# EAGLE board RasPi_Controller_RHD_Rev3_GND_Stitch (EAGLE 9.6.2)
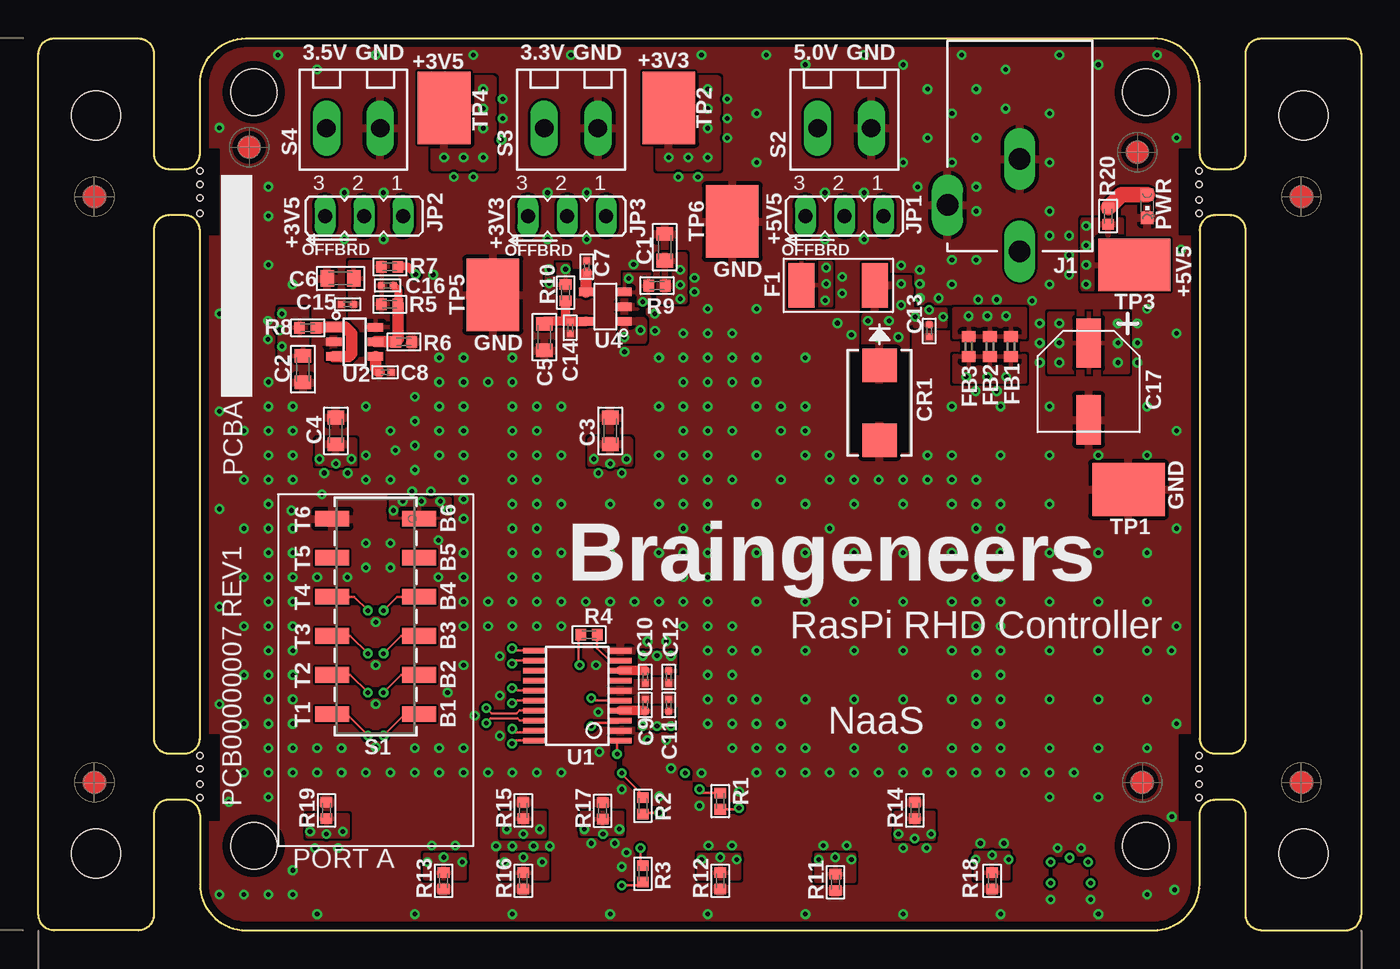
[diagram p0: board, top side]
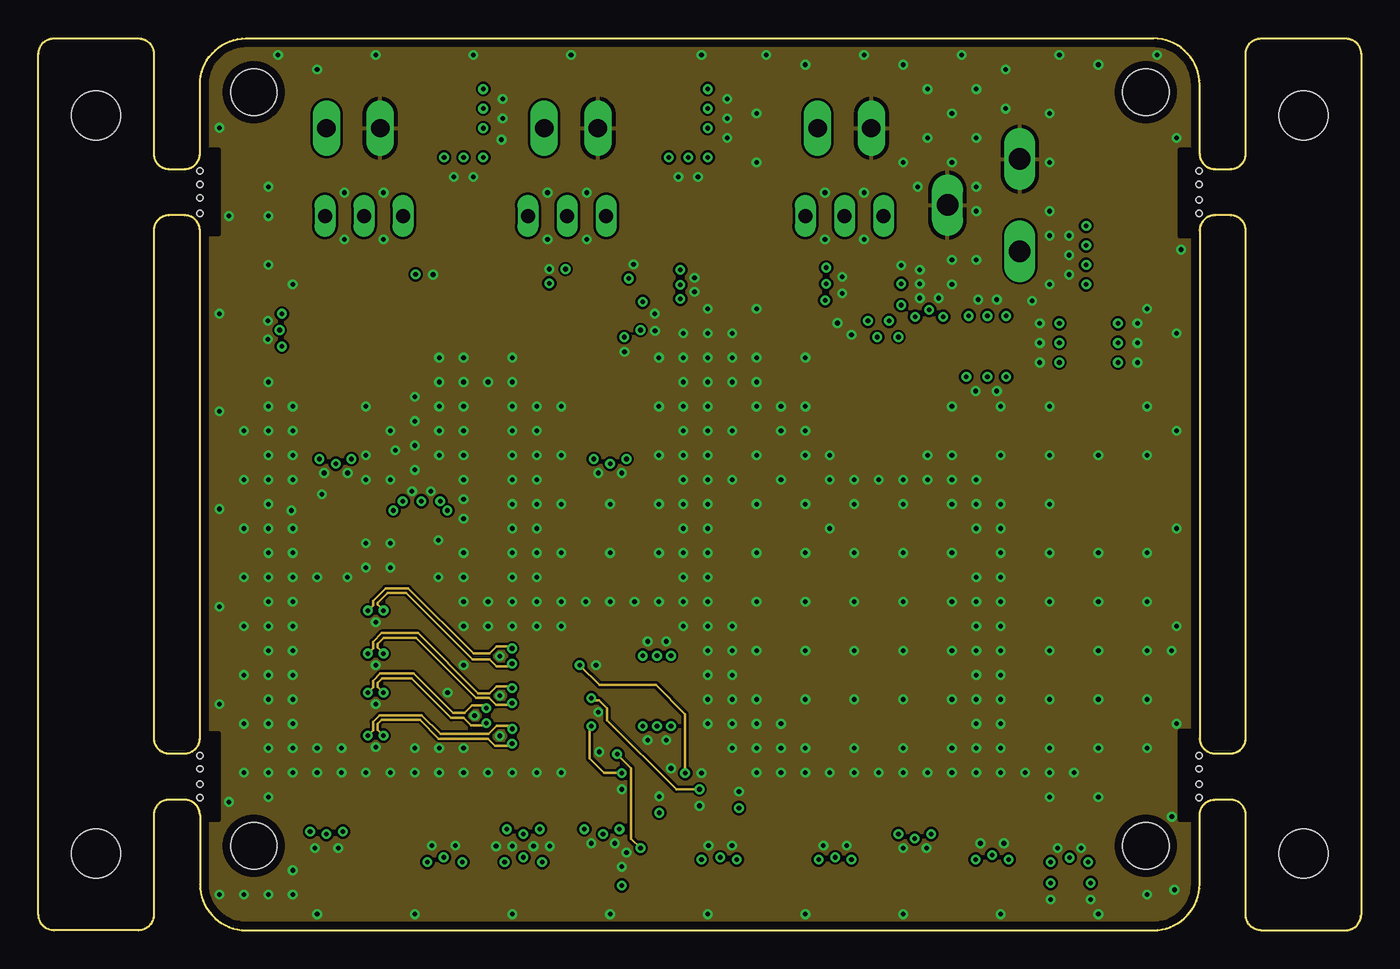
[diagram p1: board, inner layer Signal/Power2]
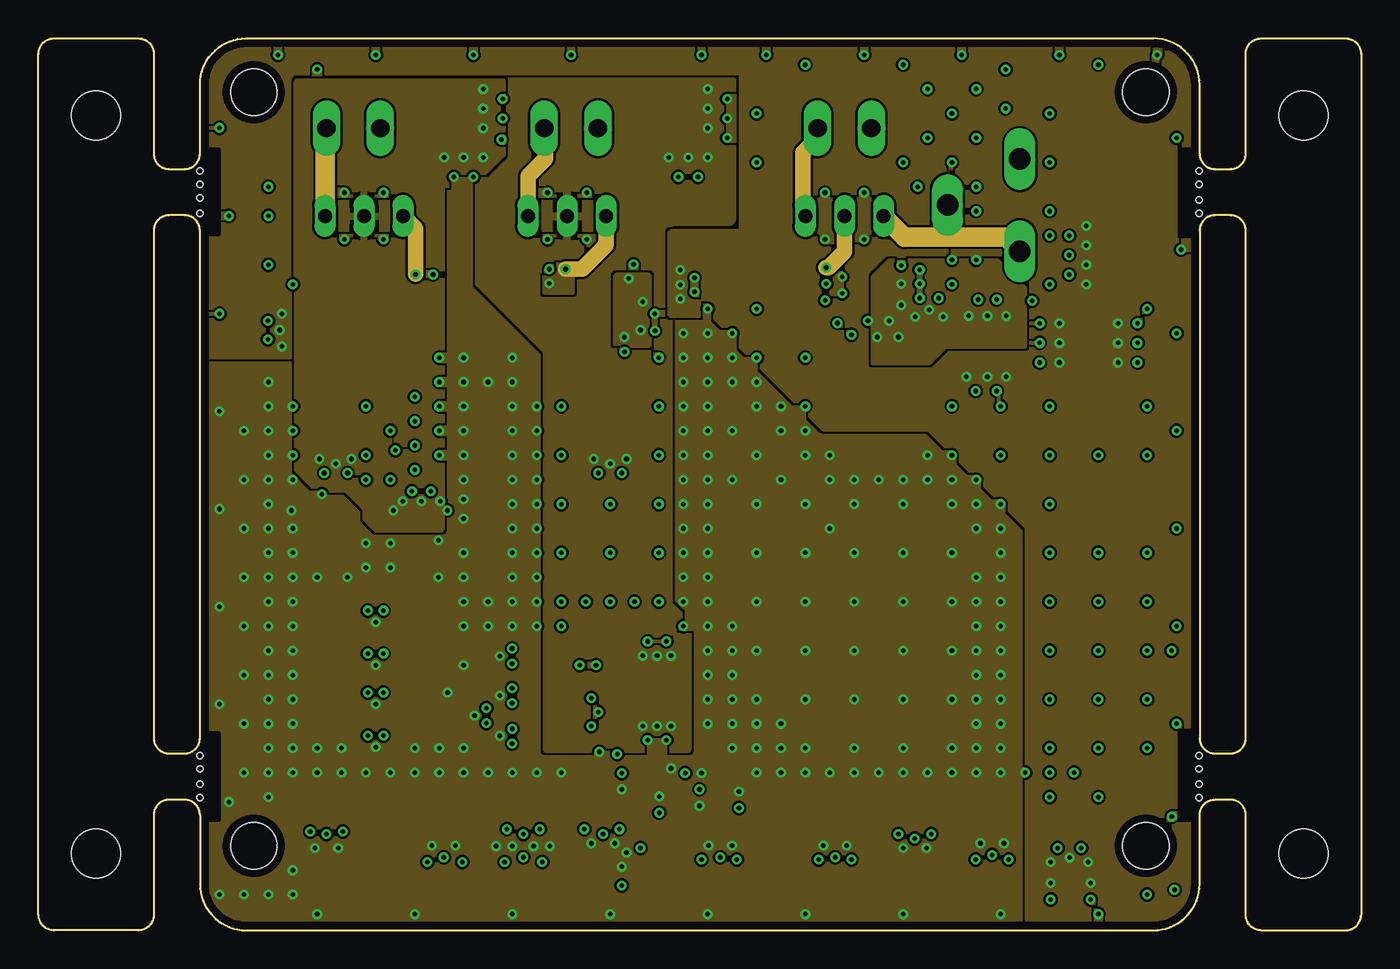
[diagram p2: board, inner layer Signal/Power3]
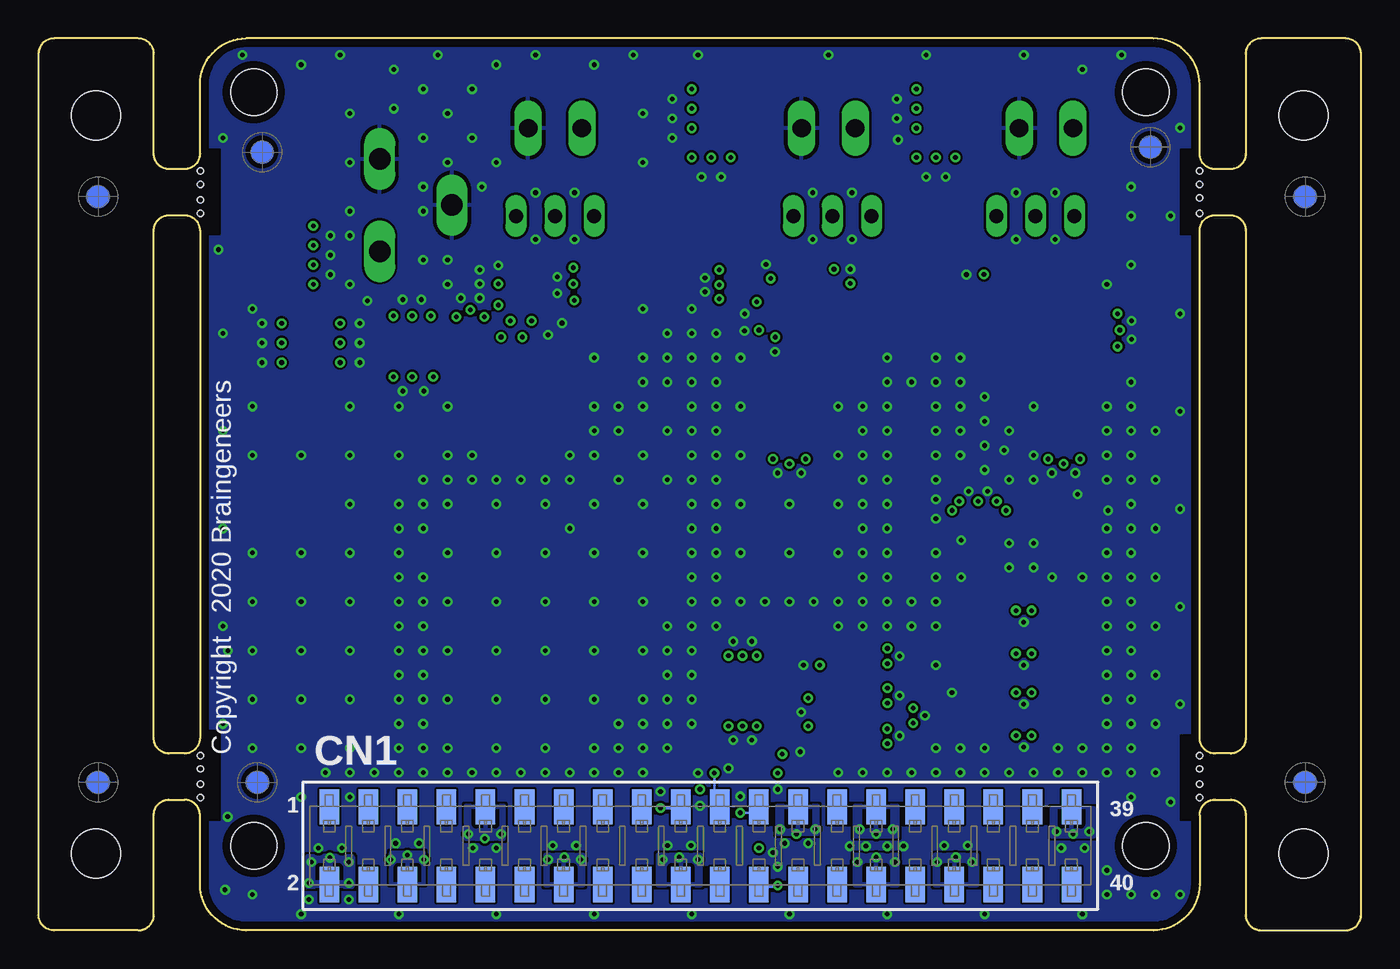
[diagram p3: board, bottom side, seen from below]

Size 86 x 58 mm. Coordinates in mm from the lower left corner, seen from the top.
Outline: 10.5,7.5 10.5,3 arc90 13.5,0 72.5,0 arc90 75.5,3 75.5,7.5 arc-90 76.5,8.5 77.5,8.5 arc-90 78.5,7.5 78.5,1 arc90 79.5,0 85,0 arc90 86,1 86,57 arc90 85,58 79.5,58 arc90 78.5,57 78.5,50.5 arc-90 77.5,49.5 76.5,49.5 arc-90 75.5,50.5 75.5,55 arc90 72.5,58 13.5,58 arc90 10.5,55 10.5,50.5 arc-90 9.5,49.5 8.5,49.5 arc-90 7.5,50.5 7.5,57 arc90 6.5,58 1,58 arc90 0,57 0,1 arc90 1,0 6.5,0 arc90 7.5,1 7.5,7.5 arc-90 8.5,8.5 9.5,8.5 arc-90 10.5,7.5
Outline: 10.5,12.5 10.5,45.5 arc90 9.5,46.5 8.5,46.5 arc90 7.5,45.5 7.5,12.5 arc90 8.5,11.5 9.5,11.5 arc90 10.5,12.5
Outline: 75.5,45.5 75.5,12.5 arc90 76.5,11.5 77.5,11.5 arc90 78.5,12.5 78.5,45.5 arc90 77.5,46.5 76.5,46.5 arc90 75.5,45.5
Copper layers (1+2*15+16): Top(GND)1 0.035mm / dielectric 8mil / Signal/Power2 0.035mm / dielectric 1.0284mm / Signal/Power3 0.035mm / dielectric 8mil / Bottom(GND)4 0.035mm
Design rules "default *": minimum track width 6mil, minimum drill 10mil, track to track 6mil, track to pad 6.5mil, pad to pad 6mil, via to via 6mil, smd to smd 6mil, copper to edge 20mil, drill to drill 15mil, minimum pad ring 6.5mil, minimum via ring 6.5mil, stop-mask expansion 3mil, vias tented up to drill 12mil, thermal gap 10mil
Net classes: 0 default: width 0.152 mm; 1 thick: width 0.254 mm; 2 power: width 0.61 mm; 3 diff pairs: width 0.152 mm
Holes 3 mm at 14,5.5 72,5.5 14,54.5 72,54.5
Holes 0.38 mm at 10.5,8.63 10.5,9.5 10.5,10.5 10.5,11.37 10.5,46.63 10.5,49.37 10.5,48.5 10.5,47.63 75.47,8.63 75.47,9.5 75.47,10.5 75.47,11.37 75.47,46.63 75.47,49.37 75.47,48.5 75.47,47.5
Holes 3.17 mm at 3.75,5 3.75,53 82.25,5 82.25,53
tKeepout: area 10.5,45.3 to 11.8,50.8; area 10.5,7.2 to 11.8,12.8; area 74.2,7.2 to 75.5,13; area 74.2,45.1 to 75.5,50.8
bKeepout: area 10.5,45.3 to 11.8,50.8; area 10.5,7.2 to 11.8,12.8; area 74.2,7.2 to 75.5,12.8; area 74.2,45.1 to 75.5,50.8
tRestrict: area 10.5,7.2 to 11.7,12.7; area 74.2,7.2 to 75.4,12.7; area 74.2,45.3 to 75.4,50.8; area 10.5,45.3 to 11.7,50.8
bRestrict: area 10.5,7.2 to 11.7,12.7; area 10.5,45.3 to 11.7,50.8; area 74.2,45.3 to 75.4,50.8; area 74.2,7.2 to 75.4,13

## Footprints (pad centres in the part's own frame; a part is rotated, then mirrored left to right if it is on the bottom)
0603 = smd 0.889 x 1.067: 1 -0.864,0; 2 0.864,0
0201 = smd 0.432 x 0.432: 1 -0.394,0; 2 0.394,0
EEE-HAE101XAP = smd 1.6 x 3.2: 1 0,0; 2 0,5
SAMTEC-HLE-120-02-X-DV = smd 1.27 x 2.29 bottom: 1 24.13,2.527; 2 24.13,-2.527; 3 21.59,2.527; 4 21.59,-2.527; 5 19.05,2.527; 6 19.05,-2.527; 7 16.51,2.527; 8 16.51,-2.527; 9 13.97,2.527; 10 13.97,-2.527; 11 11.43,2.527; 12 11.43,-2.527; 13 8.89,2.527; 14 8.89,-2.527; 15 6.35,2.527; 16 6.35,-2.527; 17 3.81,2.527; 18 3.81,-2.527; 19 1.27,2.527; 20 1.27,-2.527; 21 -1.27,2.527; 22 -1.27,-2.527; 23 -3.81,2.527; 24 -3.81,-2.527; 25 -6.35,2.527; 26 -6.35,-2.527; 27 -8.89,2.527; 28 -8.89,-2.527; 29 -11.43,2.527; 30 -11.43,-2.527; 31 -13.97,2.527; 32 -13.97,-2.527; 33 -16.51,2.527; 34 -16.51,-2.527; 35 -19.05,2.527; 36 -19.05,-2.527; 37 -21.59,2.527; 38 -21.59,-2.527; 39 -24.13,2.527; 40 -24.13,-2.527
DIODE_DO214AA = smd 2.159 x 2.261: 1 -2.438,0; 2 2.438,0
MF-MSMF250/16X-2 = smd 1.676 x 2.896: P$1 0.838,1.448; P$2 5.613,1.448
0402 = smd 0.7 x 0.9: 1 -0.65,0; 2 0.65,0
PJ-102AH = drill 1.4 long: 1 0,-3; 2 0,3; 3 -4.7,0
JP2 = drill 0.914 long: 1 -2.54,0; 2 0,0; 3 2.54,0
CHIPLED_0603 = smd 0.8 x 0.8: A 0,-0.75; C 0,0.75
0402' = smd 0.686 x 0.762: 1 -0.533,0; 2 0.533,0
INTAN_SMT_RHD_SPI_CABLE_ADAPTER = smd 1.016 x 2.223: B1 6.35,2.826; B2 3.81,2.826; B3 1.27,2.826; B4 -1.27,2.826; B5 -3.81,2.826; B6 -6.35,2.826; T1 6.35,-2.826; T2 3.81,-2.826; T3 1.27,-2.826; T4 -1.27,-2.826; T5 -3.81,-2.826; T6 -6.35,-2.826
TERMINAL_BLOCK_3.5MM_2_5V = drill 1.2 long: 1 -1.75,0; 2 1.75,0
TERMINAL_BLOCK_3.5MM_2_3.3V = drill 1.2 long: 1 -1.75,0; 2 1.75,0
TERMINAL_BLOCK_3.5MM_2_3.5V = drill 1.2 long: 1 -1.75,0; 2 1.75,0
5016 = smd 4.699 x 3.429: P$1 -0.051,0
TSSOP-20 = smd 0.348 x 1.397: 1 -2.923,-2.814; 2 -2.273,-2.815; 3 -1.623,-2.815; 4 -0.973,-2.815; 5 -0.323,-2.815; 6 0.327,-2.815; 7 0.977,-2.815; 8 1.627,-2.815; 9 2.277,-2.815; 10 2.927,-2.815; 11 2.927,2.825; 12 2.277,2.825; 13 1.627,2.825; 14 0.977,2.825; 15 0.327,2.825; 16 -0.323,2.825; 17 -0.973,2.825; 18 -1.623,2.825; 19 -2.273,2.825; 20 -2.923,2.825
SOT-23-6 = smd 0.55 x 1: 1 -0.95,-1.35; 2 0,-1.35; 3 0.95,-1.35; 4 0.95,1.35; 5 0,1.35; 6 -0.95,1.35
TSOT-23-5 = smd 0.55 x 0.9: 1 -0.95,-1.25; 2 0,-1.25; 3 0.95,-1.25; 4 0.95,1.25; 5 -0.95,1.25

## Placement (x,y rotation side)
C1  1.0u  [0603]  40.73,44.42 90 top
C2  1.0u  [0603]  17.21,36.49 270 top
C3  22u  [0603]  37.17,32.48 90 top
C4  22u  [0603]  19.34,32.48 90 top
C5  22u  [0603]  32.9,38.58 270 top
C6  22u  [0603]  19.64,42.39 180 top
C7  10n  [0201]  35.65,43.15 90 top
C8  10n  [0201]  22.54,36.29 0 top
C9  10n  [0201]  39.46,14.65 90 top
C10  10n  [0201]  39.46,16.48 270 top
C11  100n  [0201]  40.98,14.65 90 top
C12  100n  [0201]  40.98,16.48 270 top
C13  100n  [0201]  57.92,38.98 270 top
C14  100n  [0201]  34.58,39.19 270 top
C15  100n  [0201]  20.1,40.71 180 top
C16  15p  [0201]  22.69,41.93 0 top
C17  100u  [EEE-HAE101XAP]  68.28,38.2 180 top
CN1  ADA3708SMT_PI_HEADER_FEMALE  [SAMTEC-HLE-120-02-X-DV]  42.96,5.51 0 top
CR1  SMBJ5.0A  [DIODE_DO214AA]  54.7,34.31 270 top
DRILEGEND  [DRILEGEND]  34.74,-14.92 0 top  (outside the outline)
F1  MF-MSMF250/X  [MF-MSMF250/16X-2]  48.78,40.51 0 top
FB1  BLM15HB121SN1  [0402]  63.23,37.97 270 top
FB2  BLM15HB121SN1  [0402]  61.86,37.97 270 top
FB3  BLM15HB121SN1  [0402]  60.49,37.97 270 top
J1  DC_POWER_JACK-PJ-102AH  [PJ-102AH]  63.81,47.16 0 top
JP1  [JP2]  52.41,46.45 180 top
JP2  [JP2]  21.17,46.45 180 top
JP3  [JP2]  34.38,46.45 180 top
PWR  [CHIPLED_0603]  72.09,47.09 180 top
R1  22.1  [0402']  44.33,8.4 90 top
R2  22.1  [0402']  39.3,8.1 90 top
R3  22.1  [0402']  39.3,3.68 90 top
R4  22.1  [0402']  35.8,19.22 180 top
R5  56.0K  [0402']  22.84,40.71 0 top
R6  30.1K  [0402']  23.76,38.27 0 top
R7  0  [0402']  22.84,43.15 180 top
R8  0  [0402']  17.51,39.19 180 top
R9  0  [0402']  40.22,41.93 0 top
R10  0  [0402']  34.27,41.47 270 top
R11  0  [0402']  51.83,3.12 90 top
R12  0  [0402']  44.33,3.22 90 top
R13  0  [0402']  26.35,3.22 90 top
R14  0  [0402']  56.98,7.79 90 top
R15  0  [0402']  31.53,7.79 90 top
R16  0  [0402']  31.53,3.22 90 top
R17  0  [0402']  36.69,7.77 90 top
R18  0  [0402']  62.01,3.22 90 top
R19  0  [0402']  18.73,7.79 90 top
R20  1K  [0402']  69.56,46.45 90 top
S1  RHD2000-CABLE-DAQ-SIDEINTAN_SMT_SPI_CABLE_ADAPTER  [INTAN_SMT_RHD_SPI_CABLE_ADAPTER]  21.93,20.41 270 top
S2  TERMINAL_BLOCK_2-3.5MM-5V  [TERMINAL_BLOCK_3.5MM_2_5V]  52.41,52.16 180 top
S3  TERMINAL_BLOCK_2-3.5MM-3.3V  [TERMINAL_BLOCK_3.5MM_2_3.3V]  34.63,52.16 180 top
S4  TERMINAL_BLOCK_2-3.5MM-3.5V  [TERMINAL_BLOCK_3.5MM_2_3.5V]  20.48,52.16 180 top
TP1  5016  [5016]  70.83,28.67 180 top
TP2  5016  [5016]  40.98,53.44 270 top
TP3  5016  [5016]  71.31,43.27 0 top
TP4  5016  [5016]  26.38,53.44 270 top
TP5  5016  [5016]  29.55,41.37 90 top
TP6  5016  [5016]  45.12,46.15 90 top
U1  SN65LVDT41  [TSSOP-20]  35.04,15.26 90 top
U2  TPS79301  [SOT-23-6]  20.56,38.27 270 top
U4  TPS79333  [TSOT-23-5]  36.87,40.56 90 top
U$1  [FIDUCIAL_G15]  3.64,9.62 90 top
U$7  [NASS_LOGO_LG]  50.12,7.79 0 top
U$31  [ROHS_LG]  13.83,19.48 0 top
U$32  [FIDUCIAL_G15]  13.7,50.92 270 bottom
U$33  [LOGO_BRAINGENEERS_H_12MM]  39.68,26.31 0 top
U$34  [FIDUCIAL_G15]  3.64,47.72 90 top
U$35  [FIDUCIAL_G15]  3.64,9.62 270 bottom
U$36  [FIDUCIAL_G15]  3.64,47.72 270 bottom
U$48  [FIDUCIAL_G15]  82.13,9.62 90 top
U$49  [FIDUCIAL_G15]  82.13,47.72 90 top
U$50  [FIDUCIAL_G15]  82.13,9.62 270 bottom
U$51  [FIDUCIAL_G15]  82.13,47.72 270 bottom
U$52  [A5L-LOC]  -10.85,-64.19 0 top  (outside the outline)
U$67  [FIDUCIAL_G15]  71.46,50.62 0 top
U$68  [FIDUCIAL_G15]  71.76,9.62 0 top
U$69  [FIDUCIAL_G15]  13.7,50.92 0 top
U$70  [NO_TRASH_LG]  12.02,30.5 0 top
U$72  [STATIC_LG]  12.79,25.01 0 top
U$73  [FIDUCIAL_G15]  71.76,9.62 0 bottom
U$75  [FIDUCIAL_G15]  71.46,50.62 0 bottom
U$84  [COMPYRIGHT_MED]  73.06,22.14 270 top

## Library data of the parts
C1-C6 CN1 F1 J1 S1-S4 U1 U$31 U$33 = Braingeneers_Lib
C7-C16 R1-R20 U2 = RHD2000_eval_board
C17 = Braingeneers_Lib; CAPACITOR: 100u
CR1 = Braingeneers_Lib; BUILT_BY: EMA_UL_Team; MANUFACTURER_PART_NUMBER: SMBJ5.0A; SOURCELIBRARY: Bourns_2014-12-31; VENDOR: Bourns Electronics
DRILEGEND = drilegend
FB1-FB3 = inductors
JP1-JP3 = jumper
PWR = adafruit
TP1-TP6 = RHD2000
U4 = harrison
U$1 U$32 U$34-U$36 U$48-U$51 U$67-U$69 U$73 U$75 = dicons
U$7 U$70 U$72 U$84 = logo_braingeneers
U$52 = frames

## Nets
!CS!: R3.2 U1.1
!CS!_N [diff pairs]: S1.T1 U1.19
!CS!_P [diff pairs]: S1.B1 U1.20
+3V3 [power]: C3.1 C9.1 C10.1 C11.1 C12.1 JP3.2 TP2.P$1 U1.4 U1.8
+3V3_REG [power]: C5.1 C14.1 R10.2 U4.5
+3V5: C4.1 JP2.2 S1.B6 TP4.P$1
+5V [power]: C1.1 C2.1 C17.1 CN1.2 FB1.2 FB2.2 FB3.2 R8.2 R9.2 R20.1 TP3.P$1
+5V_JACK [power]: J1.1 JP1.1
GND [power]: C1.2 C2.2 C3.2 C4.2 C5.2 C6.2 C7.2 C8.2 C9.2 C10.2 C11.2 C12.2 C13.2 C14.2 C15.2 C17.2 CR1.2 J1.2 J1.3 PWR.C R6.2 R11.1 R12.1 R13.1 R14.2 R15.2 R16.1 R17.2 R18.1 R19.2 S1.T6 S2.1 S3.1 S4.1 TP1.P$1 TP5.P$1 TP6.P$1 U1.2 U1.6 U1.10 U2.2 U4.2
MISO: CN1.21 R4.2
MISO_N [diff pairs]: S1.T4 U1.11
MISO_P [diff pairs]: S1.B4 U1.12
MOSI: R1.2 U1.5
MOSI_N [diff pairs]: S1.T3 U1.15
MOSI_P [diff pairs]: S1.B3 U1.16
N$1: U1.7
N$2: C13.1 CR1.1 F1.P$2 FB1.1 FB2.1 FB3.1
N$3 [diff pairs]: U1.13
N$4: CN1.6 R18.2
N$5: CN1.30 R16.2
N$6 [diff pairs]: U1.14
N$7: CN1.8
N$8: C8.1 U2.4
N$9: PWR.A R20.2
N$10: S1.B5
N$11: CN1.37
N$12: CN1.33
N$13: CN1.35
N$14 [power]: CN1.25 R17.1
N$15: CN1.27
N$16: CN1.29 R15.1
N$17: CN1.7
N$18 [power]: CN1.9 R14.1
N$19: CN1.11
N$20: CN1.13
N$21: CN1.3
N$22: CN1.5
N$23 [power]: CN1.1
N$24: CN1.15
N$25: S1.T5
N$26: CN1.10
N$27: CN1.12
N$28 [power]: CN1.14 R11.2
N$29: CN1.16
N$30: CN1.20 R12.2
N$31: CN1.22
N$32: CN1.18
N$33 [power]: CN1.4
N$34: CN1.40
N$35: CN1.38
N$36: CN1.36
N$37 [power]: CN1.34 R13.2
N$38: JP1.3 S2.2
N$39: C16.2 R5.2 R6.1 U2.5
N$40: C7.1 U4.4
N$42 [power]: R9.1 U4.1 U4.3
N$43 [power]: R8.1 U2.1 U2.3
N$44: F1.P$1 JP1.2
N$45: JP3.3 S3.2
N$46: JP2.3 S4.2
N$47: JP2.1 R7.1
N$48: JP3.1 R10.1
N$49: CN1.23 R2.1
N$50: CN1.24 R3.1
N$51: R4.1 U1.9
N$52 [power]: CN1.39 R19.1
N$53: CN1.31
N$54 [power]: CN1.17
N$55: CN1.32
N$56: CN1.19 R1.1
N$57: CN1.28
N$58: CN1.26
SCLK: R2.2 U1.3
SCLK_N [diff pairs]: S1.T2 U1.17
SCLK_P [diff pairs]: S1.B2 U1.18
U2_OUT [power]: C6.1 C15.1 C16.1 R5.1 R7.2 U2.6

## Tracks (layer width: path | path; a pad name or v marks a point on that pad's centre or on a via)
!CS!  (via drill 0.3)
  Top(GND)1 0.178: v39.15,5.35 39.15,4.36 R3.2 | U1.1 37.7,12.34 37.63,12.27 v37.63,11.45
  Signal/Power2 0.178: v37.63,11.45 38.54,10.53 38.54,5.96 v39.15,5.35
!CS!_N  (via drill 0.3)
  Top(GND)1 0.152: v30.82,13.1 31.04,12.88 32.11,12.88 | v21.42,12.67 20.02,14.06 S1.T1
  Top(GND)1 0.178: 32.11,12.88 U1.19
  Signal/Power2 0.152: v30.82,13.1 30.63,13.29 29.79,13.29 29.28,12.78 26.13,12.78 24.93,13.99 22.19,13.99 21.75,13.56 21.75,13 v21.42,12.67
!CS!_P  (via drill 0.3)
  Top(GND)1 0.152: v30.8,12.13 31,12.34 U1.20 | v22.44,12.67 23.84,14.06 S1.B1
  Signal/Power2 0.152: v30.8,12.13 30.66,11.99 29.69,11.99 29.23,12.45 26.03,12.45 24.8,13.68 22.31,13.68 22.06,13.43 22.06,13.05 v22.44,12.67
+3V3  (via drill 0.3)
  Top(GND)1 0.61: C9.1 39.42,14.29 U1.4 | U1.8 39.44,16.89 C10.1
  other vias: 38.24,30.65 41.13,13.28 39.3,13.28 40.22,13.28 39.3,17.85 40.22,17.85 41.13,17.85 43.52,52.16 43.52,53.44 43.52,54.7 37.17,30.35 36.1,30.65 40.98,50.26 42.25,50.26 43.52,50.26
  pour Top(GND)1: 40.34,49.62 44.16,49.62 44.16,55.34 40.34,55.34
  pour Top(GND)1: 39.08,13.13 39.08,14.5 41.28,14.5 41.28,13.13
  pour Signal/Power3 (rank 3): 28.64,55.34 45.09,55.34 45.09,46.2 44.94,46.04 40.98,46.04 40.98,21.2 42.2,19.98 42.2,11.75 33.06,11.75 33.06,37.66 28.64,42.08
  pour Top(GND)1: 39.13,18.03 41.39,18.03 41.39,16.73 39.13,16.73
  pour Top(GND)1: 35.95,31.87 38.39,31.87 38.39,30.35 35.95,30.35
+3V3_REG
  Top(GND)1 0.61: U4.5 35.59,39.58 C14.1 | C14.1 34.53,39.63 32.94,39.63 C5.1 | R10.2 34.27,39.88 C14.1
+3V5  (via drill 0.3)
  other vias: 18.27,30.65 19.34,30.35 20.36,30.65 23.07,27.3 26.58,27.3 23.68,27.91 26.12,27.91 28.91,54.7 28.91,53.44 26.38,50.26 27.64,50.26 28.91,50.26 28.91,52.16 24.9,27.91
  pour Top(GND)1: 25.74,49.62 29.55,49.62 29.55,55.34 25.74,55.34
  pour Top(GND)1: 18.22,30.35 20.51,30.35 20.51,31.79 18.22,31.79
  pour Top(GND)1: 22.92,26.84 22.92,28.06 26.73,28.06 26.73,26.84
  pour Signal/Power3: 16.82,55.19 30.16,55.19 30.16,50.46 28.18,48.48 26.17,48.48 26.17,26.08 21.98,26.08 21.3,26.77 21.3,27.4 20.02,28.67 18.12,28.67 16.85,29.94
+5V  (via drill 0.3)
  other vias: 66.38,39.47 66.38,36.92 70.19,39.47 60.33,35.99 61.71,35.99 62.93,35.99 68.13,42.01 68.13,43.27 68.13,44.55 68.13,45.81 70.19,36.92 66.38,38.2 70.19,38.2 68.26,4.44 68.41,3.07 67.04,4.72 65.82,4.44 65.82,3.07 41.74,41.07 41.74,42.94 41.74,41.98 15.68,39.03 15.83,40.1 15.83,37.97
  pour Top(GND)1: 59.57,37.36 64.14,37.36 64.14,35.68 59.57,35.68
  pour Top(GND)1: 67.95,46.2 70.39,46.2 70.39,41.73 67.95,41.73
  pour Bottom(GND)4: 68.41,4.74 65.67,4.74 65.67,2.91 68.41,2.91
  pour Top(GND)1: 42,40.89 40.4,40.89 40.4,43.94 42,43.94
  pour Top(GND)1: 65.75,36.29 70.83,36.29 70.83,40.1 65.75,40.1
  pour Signal/Power3 (rank 2): 64.3,-0.59 76.79,-0.59 76.79,59.45 9.07,59.45 9.07,37.36 16.42,37.36 16.42,55.8 45.7,55.8 45.7,37.97 51.04,32.63 57.9,32.63 64.3,26.23
  pour Signal/Power3: 45.7,45.33 41.13,45.33 41.13,40.1 43.88,40.1 45.7,38.27
  pour Top(GND)1: 17.46,37.26 15.68,37.26 15.68,40.4 17.46,40.4
+5V_JACK
  Signal/Power3 1.27: J1.1 62.9,45.08 56.32,45.08 JP1.1
GND  (via drill 0.3)
  other vias: 11.77,14.7 11.77,21.05 11.77,27.4 11.77,33.75 11.77,40.1 12.38,46.45 15.58,56.93 11.77,52.19 21.93,56.93 28.28,56.93 34.63,56.93 43.11,56.93 47.33,56.93 53.68,56.93 60.03,56.93 66.38,56.93 72.73,56.93 74,51.53 74.3,44.27 74,38.83 74,32.48 74,26.13 74,19.78 74,13.43 73.7,7.38 73.87,2.63 68.92,1.05 62.57,1.05 56.22,1.05 49.87,1.05 43.52,1.05 37.17,1.05 30.82,1.05 24.47,1.05 18.12,1.05 11.77,2.32 12.38,8.35 52.26,41.42 33.11,47.97 53.68,47.97 51.14,47.97 52.26,42.49 65.11,36.92 65.11,39.47 65.11,38.2 60.94,35.07 62.32,35.07 61.1,41.01 62.32,41.01 67.02,45.18 67.02,43.91 67.02,42.64 37.93,4.13 38.24,5.05 36.46,11.6 39.61,18.79 41.13,10.53 37.93,9.16 42.99,8.1 67.8,5.35 66.28,5.35 68.41,2 35.95,5.66 43.11,10.23 39.61,12.36 21.93,11.91 21.93,14.7 21.93,17.24 21.93,20.03 33.21,43 44.79,54.07 44.79,52.8 40.07,40.1 40.09,38.98 30.18,54.07 30.18,52.8 36.41,29.74 35.65,47.97 36.26,17.24 36.41,14.19 40.83,12.36 40.83,18.79 25.66,42.64 71.46,39.47 71.46,38.2 71.46,36.92 56.09,43.25 57.31,42.94 57.31,41.12 58.53,41.12 57.31,42.03 19.9,47.97 22.44,47.97 52.87,38.73 51.95,39.49 65.82,2 27.64,28.04 16.44,27.3 37.93,29.74 42.66,42.44 42.66,41.52 38.69,43.3 14.92,39.64 14.92,38.42 30.01,12.64 28.36,13.96 30.01,15.26 30.01,17.82 18.58,29.74 20.1,29.74 41.61,48.99 44.79,51.53 42.88,48.99 27.01,48.99 28.28,48.99 30.11,51.42 17.97,5.35 19.49,5.35 30.82,5.47 32.19,5.47 33.26,5.47 29.75,5.47 25.59,5.51 27.11,5.51 37.47,5.66 43.57,5.51 45.09,5.51 51.04,5.51 52.56,5.51 56.22,5.35 57.74,5.35 61.25,5.66 62.77,5.66 33.11,44.93 35.65,44.93 19.9,44.93 22.44,44.93 51.14,44.93 53.68,44.93 38.11,37.61 45.55,9.01 40.37,8.71 49.87,37.24 46.7,34.07 49.87,30.89 46.7,27.72 49.87,24.54 46.7,21.37 46.7,15.02 49.87,18.19 49.87,11.84 53.05,15.02 53.05,21.37 53.05,27.72 56.22,24.54 59.4,21.37 62.57,18.19 59.4,15.02 56.22,18.19 62.57,11.84 62.57,24.54 59.4,27.72 49.87,15.02 53.05,18.19 56.22,15.02 59.4,18.19 56.22,21.37 62.57,21.37 59.4,24.54 56.22,27.72 53.05,24.54 49.87,21.37 46.7,18.19 43.52,18.19 43.52,21.37 43.52,24.54 46.7,30.89 43.52,30.89 43.52,34.07 43.52,37.24 46.7,37.24 49.87,34.07 49.87,27.72 46.7,24.54 43.52,27.72 40.34,27.72 40.34,30.89 40.34,34.07 40.34,37.24 40.34,24.54 40.34,21.37 43.52,15.02 46.7,11.84 53.05,11.84 56.22,11.84 59.4,11.84 62.57,15.02 65.75,15.02 65.75,18.19 65.75,21.37 65.75,24.54 65.75,27.72 65.75,30.89 62.57,30.89 62.57,27.72 68.92,21.37 68.92,24.54 72.09,24.54 72.09,21.37 72.09,18.19 72.09,15.02 72.09,11.84 68.92,15.02 68.92,18.19 68.92,11.84 65.75,11.84 72.09,2.32 68.92,8.67 65.75,8.67 37.17,27.72 37.17,24.54 34,24.54 34,27.72 34,30.89 34,34.07 30.82,34.07 27.64,34.07 24.47,34.7 21.3,30.89 30.82,37.24 27.64,37.24 30.82,30.89 27.64,30.89 24.47,31.53 30.82,27.72 30.82,24.54 30.82,21.37 34,21.37 37.17,21.37 27.64,21.37 27.64,24.54 21.3,34.07 14.95,34.07 14.95,30.89 14.95,27.72 14.95,24.54 14.95,21.37 14.95,18.19 14.95,15.02 14.95,11.84 14.95,8.67 18.12,11.84 21.3,25.18 24.47,11.84 27.64,11.84 14.95,43.27 14.95,46.45 18.12,55.98 46.7,40.42 43.52,40.42 46.7,49.94 46.7,53.12 49.87,56.29 56.22,56.29 59.4,53.12 56.22,49.94 59.4,43.59 65.75,46.77 65.75,49.94 65.75,53.12 68.92,56.29 72.09,40.42 72.09,34.07 72.09,30.89 68.92,30.89 65.75,34.07 62.57,34.07 59.4,30.89 59.4,34.07 41.93,38.83 41.93,35.66 41.93,32.48 41.93,29.3 41.93,26.13 41.93,22.95 41.93,19.78 43.52,16.61 43.52,13.43 43.52,19.78 41.93,21.37 38.76,21.37 41.93,24.54 41.93,27.72 41.93,30.89 41.93,34.07 41.93,37.24 45.11,11.84 46.7,10.26 45.11,13.43 48.28,10.26 14.95,19.78 14.95,16.61 14.95,13.43 14.95,10.26 16.53,22.95 16.53,21.37 16.53,19.78 16.53,18.19 16.53,16.61 16.53,15.02 16.53,13.43 16.53,11.84 18.12,22.95 16.53,26.13 16.53,24.54 14.95,22.95 16.53,29.3 21.3,29.3 22.88,29.3 23.2,31.21 24.47,29.94 18.44,28.35 25.99,22.95 27.64,17.24 27.64,19.78 25.99,25.37 27.64,22.95 27.64,26.77 29.23,19.78 29.23,21.37 30.82,19.78 32.41,19.78 32.41,21.37 34,19.78 35.58,21.37 19.71,10.26 21.3,10.26 22.88,10.26 24.47,10.26 26.06,10.26 27.64,10.26 29.23,10.26 30.82,10.26 32.41,10.26 34,10.26 18.12,10.26 16.53,10.26 19.71,11.84 26.06,11.84 22.88,25.18 21.3,23.59 22.88,23.59 26.6,15.46 20.09,22.95 26.06,35.66 29.23,35.66 22.88,32.48 16.53,32.48 14.95,35.66 16.53,34.07 14.95,32.48 16.53,30.89 14.95,48.35 45.11,38.83 45.11,35.66 45.11,32.48 45.11,29.3 43.52,29.3 43.52,32.48 43.52,35.66 43.52,38.83 43.52,26.13 57.81,54.7 57.81,51.53 60.98,43.59 64.61,40.94 65.75,45.18 65.75,42.01 59.4,42.01 60.98,46.77 48.28,13.43 51.46,10.26 54.63,10.26 57.81,10.26 60.98,10.26 64.16,10.26 65.75,10.26 67.33,10.26 62.57,10.26 59.4,10.26 56.22,10.26 53.05,10.26 49.87,10.26 73.68,18.19 60.98,29.3 57.81,29.3 54.63,29.3 51.46,29.3 48.28,32.48 60.98,22.95 60.98,19.78 60.98,18.19 60.98,21.37 60.98,16.61 60.98,15.02 60.98,13.43 60.98,11.84 60.98,26.13 13.36,13.43 13.36,10.26 13.36,16.61 13.36,19.78 13.36,22.95 13.36,26.13 13.36,29.3 13.36,32.48 16.53,42.01 45.11,15.02 46.7,13.43 48.28,11.84 45.11,16.61 45.11,18.19 45.11,19.78 43.52,22.95 24.47,33.11 26.06,30.89 26.06,32.48 26.06,34.07 26.06,37.24 27.64,29.3 27.64,35.66 27.64,32.48 48.28,29.3 51.46,26.13 62.57,13.43 62.57,16.61 62.57,22.95 62.57,19.78 30.82,32.48 30.82,29.3 30.82,26.13 30.82,22.95 32.41,34.07 32.41,32.48 32.41,30.89 32.41,29.3 32.41,27.72 30.82,35.66 32.41,24.54 32.41,26.13 32.41,22.95 60.98,27.72 59.4,29.3 62.57,26.13 57.81,30.89 51.46,30.89 49.87,32.48 48.28,34.07 46.7,35.66 45.11,37.24 56.22,29.3 53.05,29.3 14.95,29.3 14.95,26.13 14.95,2.32 16.53,2.32 16.53,3.91 13.36,2.32 60.98,51.53 60.98,54.7 62.89,55.98 62.89,53.44 57.17,48.35 59.4,49.94 60.98,48.35 24.29,28.54 25.51,28.54
  pour Top(GND)1 (rank 6): 8.52,59.98 78.7,59.98 78.7,-0.3 8.52,-0.3
  pour Bottom(GND)4 (rank 6): -0.17,58.61 -0.17,-1.22 86.78,-1.22 86.78,58.61
  pour Signal/Power3 (rank 5): 78.17,-1.45 8.06,-1.45 8.06,59.28 78.17,59.28
  pour Signal/Power2 (rank 6): -1.49,-0.92 -1.49,61.87 88.68,61.87 89.62,60.93 89.62,-0.92
  cutout Signal/Power3: 75.73,7.18 74.2,7.18 74.2,12.97 75.73,12.97
  cutout Signal/Power3: 75.73,45.13 74.2,45.13 74.2,50.77 75.73,50.77
  cutout Signal/Power3: 10.5,50.77 11.72,50.77 11.72,45.28 10.5,45.28
  cutout Signal/Power3: 10.35,7.18 11.72,7.18 11.72,12.82 10.35,12.82
  cutout Signal/Power2: 10.5,45.28 11.72,45.28 11.72,50.77 10.5,50.77
  cutout Signal/Power2: 10.35,12.82 11.72,12.82 11.72,7.18 10.35,7.18
  cutout Signal/Power2: 74.2,7.18 75.42,7.18 75.42,12.97 74.2,12.97
  cutout Signal/Power2: 75.57,50.77 74.2,50.77 74.2,45.13 75.42,45.13 75.57,45.13
MISO  (via drill 0.3)
  Top(GND)1 0.178: v35.19,17.24 35.11,17.32 35.11,19.07 R4.2
  Signal/Power2 0.178: v42.05,10.23 42.05,14.04 40.14,15.95 36.48,15.95 v35.19,17.24
  Bottom(GND)4 0.178: v42.05,10.23 42.05,8.39 CN1.21
MISO_N  (via drill 0.3)
  Top(GND)1 0.152: U1.11 31.13,18.19 30.98,18.33 v30.8,18.33 | v21.42,20.8 20.53,21.68 S1.T4
  Signal/Power2 0.152: v30.8,18.33 30.66,18.47 29.79,18.47 29.32,18 28.28,18 24.04,22.24 22.57,22.24 21.75,21.43 21.75,21.13 v21.42,20.8
MISO_P  (via drill 0.3)
  Top(GND)1 0.152: v30.8,17.34 30.99,17.54 U1.12 | v22.44,20.8 23.33,21.68 S1.B4
  Signal/Power2 0.152: v30.8,17.34 30.63,17.18 29.79,17.18 29.35,17.62 28.23,17.62 23.91,21.94 22.69,21.94 22.06,21.3 22.06,21.18 v22.44,20.8
MOSI  (via drill 0.3)
  Top(GND)1 0.178: R1.2 43.22,8.93 v42.99,9.16 | U1.5 36.12,14.94 v35.95,15.11
  Signal/Power2 0.178: v42.99,9.16 41.48,9.16 36.98,13.67 36.98,14.43 36.45,14.95 36.1,14.95 v35.95,15.11
MOSI_N  (via drill 0.3)
  Top(GND)1 0.152: U1.15 31.16,15.59 31,15.74 v30.8,15.74 | v21.42,18 20.28,19.14 S1.T3
  Signal/Power2 0.152: v30.8,15.74 30.67,15.87 29.8,15.87 29.35,15.41 28.59,15.41 24.67,19.32 22.31,19.32 21.75,18.76 21.75,18.33 v21.42,18
MOSI_P  (via drill 0.3)
  Top(GND)1 0.152: U1.16 31.16,14.94 31,14.78 v30.8,14.78 | v22.44,18 23.58,19.14 S1.B3
  Signal/Power2 0.152: v30.8,14.78 30.67,14.65 29.75,14.65 29.3,15.11 28.46,15.11 24.55,19.02 22.44,19.02 22.06,18.64 22.06,18.38 v22.44,18
N$2  (via drill 0.3)
  other vias: 60.49,39.95 61.71,39.95 62.93,39.95 57.01,39.9 57.92,40.35 58.84,39.9 56.09,40.66 56.09,42.03 55.31,39.64 54.54,38.58 55.92,38.58 53.93,39.64
  pour Top(GND)1: 59.57,38.58 59.57,40.4 64.14,40.4 64.14,38.58
  pour Top(GND)1: 57.01,39.29 58.99,39.29 58.99,40.35 57.01,40.35
  pour Top(GND)1: 54.26,39.59 56.7,39.59 56.7,42.34 54.26,42.34
  pour Top(GND)1: 53.78,39.95 56.37,39.95 56.37,35.53 53.78,35.53
  pour Signal/Power3: 54.26,36.9 54.26,42.49 55.33,43.55 62.37,43.55 64.14,41.78 64.14,37.97 58.96,37.97 57.9,36.9
  pour Top(GND)1: 54.42,39.9 56.4,39.9 56.4,42.34 54.42,42.34
N$4  (via drill 0.3)
  other vias: 60.94,4.59 62.01,4.9 63.08,4.59
  pour Top(GND)1: 60.94,3.37 63.08,3.37 63.08,5.05 60.94,5.05
  pour Bottom(GND)4: 60.94,3.07 63.08,3.07 63.08,5.05 60.94,5.05
N$5  (via drill 0.3)
  other vias: 30.31,4.44 31.53,4.74 32.75,4.44
  pour Top(GND)1: 30.16,4.9 33.06,4.9 33.06,3.37 30.16,3.37
  pour Bottom(GND)4: 30.16,4.9 32.9,4.9 32.9,2.91 30.16,2.91
N$8
  Top(GND)1 0.762: U2.4 21.91,36.53 C8.1
N$9
  Top(GND)1 1.016: R20.2 70.41,47.84 PWR.A
N$14  (via drill 0.3)
  other vias: 35.49,6.57 36.71,6.27 37.78,6.57
  pour Top(GND)1: 35.34,7.64 37.93,7.64 37.93,6.27 35.34,6.27
  pour Bottom(GND)4: 35.34,8.1 37.93,8.1 37.93,6.27 35.34,6.27
N$16  (via drill 0.3)
  other vias: 30.46,6.57 31.53,6.27 32.6,6.57
  pour Top(GND)1: 30.16,7.64 32.9,7.64 32.9,6.11 30.16,6.11
  pour Bottom(GND)4: 30.16,6.11 30.16,8.1 32.9,8.1 32.9,6.11
N$18  (via drill 0.3)
  other vias: 55.92,6.27 56.98,5.96 58.05,6.27
  pour Top(GND)1: 55.76,7.64 58.2,7.64 58.2,5.96 55.76,5.96
  pour Bottom(GND)4: 55.76,8.1 58.2,8.1 58.2,5.96 55.76,5.96
N$28  (via drill 0.3)
  other vias: 50.73,4.59 51.8,4.74 52.87,4.59
  pour Top(GND)1: 50.58,3.22 53.02,3.22 53.02,4.9 50.58,4.9
  pour Bottom(GND)4: 50.58,2.91 53.02,2.91 53.02,4.9 50.58,4.9
N$30  (via drill 0.3)
  other vias: 43.11,4.59 44.33,4.74 45.4,4.59
  pour Top(GND)1: 42.96,3.37 45.55,3.37 45.55,4.9 42.96,4.9
  pour Bottom(GND)4: 42.96,2.91 45.7,2.91 45.7,4.9 42.96,4.9
N$37  (via drill 0.3)
  other vias: 25.28,4.44 26.35,4.74 27.57,4.44
  pour Top(GND)1: 25.13,3.37 27.72,3.37 27.72,4.9 25.13,4.9
  pour Bottom(GND)4: 24.98,4.9 27.72,4.9 27.72,2.91 24.98,2.91
N$38
  Signal/Power3 1.016: S2.2 50.66,51.58 49.7,50.62 49.7,46.62 JP1.3
N$39
  Top(GND)1 0.508: C16.2 23.38,41.64 R5.2
  Top(GND)1 0.762: U2.5 R6.1 23.38,38.42 R5.2
N$40
  Top(GND)1 0.762: C7.1 35.61,42.72 U4.4
N$42  (via drill 0.3)
  other vias: 38.39,42.39 38.08,38.58 39.15,39.03 39.3,40.86
  pour Signal/Power3: 37.63,38.12 37.63,42.54 39.61,42.54 39.61,38.12
  pour Top(GND)1: 37.96,38.37 37.96,39.64 39.3,39.64 39.3,38.37
  pour Top(GND)1: 38.08,42.69 39.76,42.69 39.76,40.71 39,40.71 39,41.32 38.08,41.32
N$43
  Top(GND)1 0.762: U2.3 20.16,37.31 20.37,37.52 20.37,38.79 19.93,39.23 19.22,39.23 U2.1 18.6,39.22 18.56,39.19 R8.1
N$44  (via drill 0.3)
  Signal/Power3 1.016: v51.22,43.1 51.37,43.1 52.41,44.14 JP1.2
  other vias: 51.22,42.03 51.17,40.96
  pour Top(GND)1: 49.08,40.66 51.52,40.66 51.52,43.4 49.08,43.4
N$45
  Signal/Power3 1.016: S3.2 32.98,52.06 32.98,50.19 31.84,49.04 JP3.3
N$46
  Signal/Power3 1.27: S4.2 18.65,52.09 18.65,46.48 JP2.3
N$47  (via drill 0.3)
  Top(GND)1 0.508: R7.1 24.04,43.15 v24.52,42.66
  Signal/Power3 1.016: JP2.1 24.52,45.64 v24.52,42.66
N$48  (via drill 0.3)
  Signal/Power3 1.016: JP3.1 36.92,44.57 35.34,43 v34.27,43
  other vias: 33.21,42.08
  pour Top(GND)1: 33.06,41.62 34.43,41.62 34.43,43.3 33.06,43.3
  pour Signal/Power3: 32.9,41.47 34.73,41.47 34.73,43.3 32.9,43.3
N$49  (via drill 0.3)
  Top(GND)1 0.178: R2.1 39.3,7.64 v40.37,7.64
  Bottom(GND)4 0.178: CN1.23 39.55,7.64 v40.37,7.64
N$50  (via drill 0.3)
  Top(GND)1 0.178: R3.1 39.08,2.91 v37.93,2.91
  Bottom(GND)4 0.178: v37.93,2.91 38.02,2.83 39,2.83 CN1.24
N$51
  Top(GND)1 0.152: 37.19,17.48 36.33,18.34
  Top(GND)1 0.178: R4.1 36.33,18.34 | U1.9 37.24,17.54 37.19,17.48
N$52  (via drill 0.3)
  other vias: 18.73,6.27 17.66,6.42 19.8,6.42
  pour Top(GND)1: 20.1,6.11 20.1,7.49 17.51,7.49 17.51,6.11
  pour Bottom(GND)4: 17.36,6.11 17.36,7.94 20.1,7.94 20.1,6.11
N$56  (via drill 0.3)
  Top(GND)1 0.178: R1.1 45.48,7.87 v45.55,7.94
  Bottom(GND)4 0.178: CN1.19 44.24,8.03 44.33,7.94 v45.55,7.94
SCLK  (via drill 0.3)
  Top(GND)1 0.178: R2.2 39.3,8.78 37.93,10.15 v37.93,10.23 | v35.95,13.28 36.16,13.48 37.7,13.48 U1.3
  Signal/Power2 0.178: v37.93,10.23 36.76,10.23 35.82,11.17 35.82,13.15 v35.95,13.28
SCLK_N  (via drill 0.3)
  Top(GND)1 0.152: U1.17 31.28,14.29 31.1,14.1 29.46,14.1 v29.12,14.45 | v21.42,15.46 20.28,16.61 S1.T2
  Signal/Power2 0.152: v29.12,14.45 29.12,14.61 28.19,14.61 27.71,14.13 26.95,14.13 24.38,16.69 22.22,16.69 21.75,16.22 21.75,15.79 v21.42,15.46
SCLK_P  (via drill 0.3)
  Top(GND)1 0.152: U1.18 31.28,13.64 31.15,13.77 29.41,13.77 v29.12,13.48 | v22.44,15.46 23.58,16.61 S1.B2
  Signal/Power2 0.152: v29.12,13.48 29.04,13.4 29.13,13.32 28.14,13.32 27.66,13.8 26.85,13.8 24.25,16.39 22.35,16.39 22.06,16.1 22.06,15.84 v22.44,15.46
U2_OUT
  pour Top(GND)1: 22.69,39.03 20.25,39.03 20.25,43.45 22.69,43.45

## Text on the board
tPlace: +3V5 | +3V3 | OFFBRD | OFFBRD | +5V5 | OFFBRD | +3V5 | +3V3 | GND | +5V5 | GND | PCBA | Braingeneers | GND | RasPi RHD Controller | NaaS | PCB00000007 REV1 | PORT A
bPlace: Copyright 2020 Braingeneers
Document: DWG 00000007 | REV 3 | UNLESS OTHERWISE SPECIFIED / / DIMENSIONS ARE IN INCHES / TOLERANCES ON; / 2 PL DECIMALS +/- 0.010 / 3 PL DECIMALS +/- 0.005 / ANGLES + / FRACTIONS +
tDocu: TOP | NOTES: UNLESS OTHERWISE SPECIFIED: / / 1. WORKMANSHIP SHALL BE IN ACCORDANCE / WITH IPC-A-610A CLASS 2 REQUIREMENTS. / / 2. NOTE POLARITY OF COMPONENTS WHEN INDICATED. / / 3. SQUARE PAD OR DOT INDICATES PIN 1 OF DEVICE, + END OF CAPACITOR, / CATHODE END OF DIODES, EMITTER OF TRANSISTOR / AND PIN 1 OF A CONNECTOR. / / 4. INSERT ASSEMBLED BOARD INTO CONDUCTIVE BAG. / / 5. SEE BOM FOR REFERENCE DESIGNATORS OF / STUFFED AND UNSTUFFED COMPONENTS. / / 6. REWORK MUST CONFORM TO IPC GUIDELINES IPC-R-700C. / / 7. PCB ASSEMBLY PROCESS AND VENDOR-SUPPLIED ASSEMBLY MATERIALS / MUST BE RoHS 2 COMPLIANT (2011/EU) AND REACH COMPLIANT (EC 1907/2006) / / 8. USE A NO-WASH ASSEMBLY PROCESS. USE ONLY NO-CLEAN FLUX. / / 9. SEE BOM FOR ANY ADDITIONAL ASSEMBLY NOTES. | ASSEMBLY
DOC: BOTTOM | ASSEMBLY
DrillLegend: LAYER-STACK
DrillLegend_01-16: 01-16
DrillLegend_01-20: 01-20
Notes: TOP SIDE | DRILL CHART (ALL UNITS IN MILS) | NOTES: UNLESS OTHERWISE SPECIFIED: / / 1. PCB TO BE FABRICATED PER IPC GUIDELINES: / IPC-A-6012B OR LATEST REVISION. IPC-D-275 AND IPC-RB-276 CLASS 2 OR LATEST REVISION. / / 2. FINISHED BOARD TO BE 0.062IN +/- 10% THINK. / MATERIAL: ITEQ IT-180A, OR 370HR FR4, OR EQUIVALENT. / 4 LAYERS. LAYERS 1 AND 4 TO HAVE 1 OZ. MIN COPPER CLAD BEFORE PLATING, / AND PLATE PER IPC-6012. / COPPER PLATE ON WALL OF HOLES SHALL BE 0.001 AVERAGE, 0.0008 ABSOLUTE MINIMUM / / 3. MINIMUM ANNULAR RING IS O.002 FOR COMPONENT HOLES, TANGENCY FOR VIAS. / / 4. MASTER ARTWORK (FILM/GERBER DATA) IS NOT ETCH COMPENSATED. / COMPENSATE WORKING FILM SUCH THAT TRACE WIDTHS / MATCH TRACE WIDTHS OF MASTER ARTWORK WITHIN +/- 20% OF TRACE WIDTH / / 5. USE BLUE LIQUID PHOTO IMAGEABLE SOLDER MASK / CONFORMING TO IPC-SM-840C CLASS H. / BOARD TO HAVE SOLDER MASK OVER BARE COPPER ON BOTH SIDES. / NO SOLDER MASK TO PAD PERMISSIBLE, EXCEPT VIAS. / VIAS ARE TO BE MASKED PER ARTWORK MASTER. / / 6. SILKSCREEN BOTH SIDES USING SILKSCREEN MASTER. / SILKSCREEN TO BE WHITE NON-CONDUCTIVE, NON-NUTRIENT EPOXY INK, / OR ACRYLIC PRINT TAIYO IJR-4000 MW300. / / 7. WARPAGE NOT TO EXCEED 0.10 PER LINEAR INCH / / 8. PCB MUST PASS 100% ELECTRICAL TESTING / FOR OPENS AND SHORTS IN ACCORDANCE WITH IPC-ET-652. / TRUE NETLIST TESTING REQUIRED USING SUPPLIED IPC NETLIST. / / 9. ALL REWORK MUST FONCOFM TO IPC GUIDELINES: / IPC-R-700C (OR MOST CURRENT REVISION). / / 10. MINIMUM CONDUCTOR WITH TO BE 0.006”. / MINIMUM CONDUCTOR TO CONDUCTOR AND CONDUCTOR TO PAD SPACING TO BE 0.006” / / 11. SURFACE FINISH: ENIG (ELECTROLESS NICKEL IMMERSION GOLD) / 2-5 MICRO INCHES IMMERSION (SOFT) GOLD PLATE OVER 118-236 MICO INCHES NICKEL / / 12. ALL SOLDER PADS TO BE FREE OF SILKSCREEN INK. / / 13. PCB SHALL BE ROHS 2 COMPLIANT (2011/65/EU), REACH COMPLIANT (EC1907/2006) / AND COMPATIBLE WITH ROHS ASSEMBLY PROCESS / / 14. VIA REQUIREMENTS: FOLLOW SUPPLIED GERBERS. / SOLDER MASK ON PAD - FOLLOW SOLDER MASK GERBER FILES / / 15. OK TO ADD COPPER THIEVING TO SPARSELY POPULATED AREAS OF PCB AS NEEDED / / 16. IF COPPER PAD OR PLATED HOLES TOUCH BOARD OUTLINE, / FOLLOW GERBER AND ACCEPT COPPER EXPOSED AT BOARD EDGE / / 17. ADD TEARDROPS TO ALL PADS AT TRACE JUNCTIONS | OK WITH DEFAULT TOLERANCES | SILKSCREEN TOP / SOLDER MASK TOP / ------------------------- / LAYER 1 - TOP GROUND (1 OZ) / PREPREG: DIELECTRIC (8 MIL) / LAYER 2 - SIGNAL PLANE (1 OZ) / CORE: DIELECTRIC (FILLER) / LAYER 3 - POWER PLANE (1 OZ) / PREPREG: DIELECTRIC (8 MIL) / LAYER 4 - BOTTOM GROUND (1 OZ) / ------------------------- / SOLDER MASK BOTTOM / SILKSCREEN BOTTOM / / / TOTAL BOARD THICKNESS: 62 MIL | FABRICATION